# Altium PCB PCB1.PcbDoc (part 1 of 2)
Units mm, origin at the board's own origin, x right, y up, seen from the top; angles counter-clockwise.
Board outline 51.6 x 51.6 mm, 4 copper layers (Top Layer, Internal Plane 1, Signal Layer 1, Bottom Layer), stack 0.98 mm thick; 99 components, 76 nets, 363 pads, 363 vias.
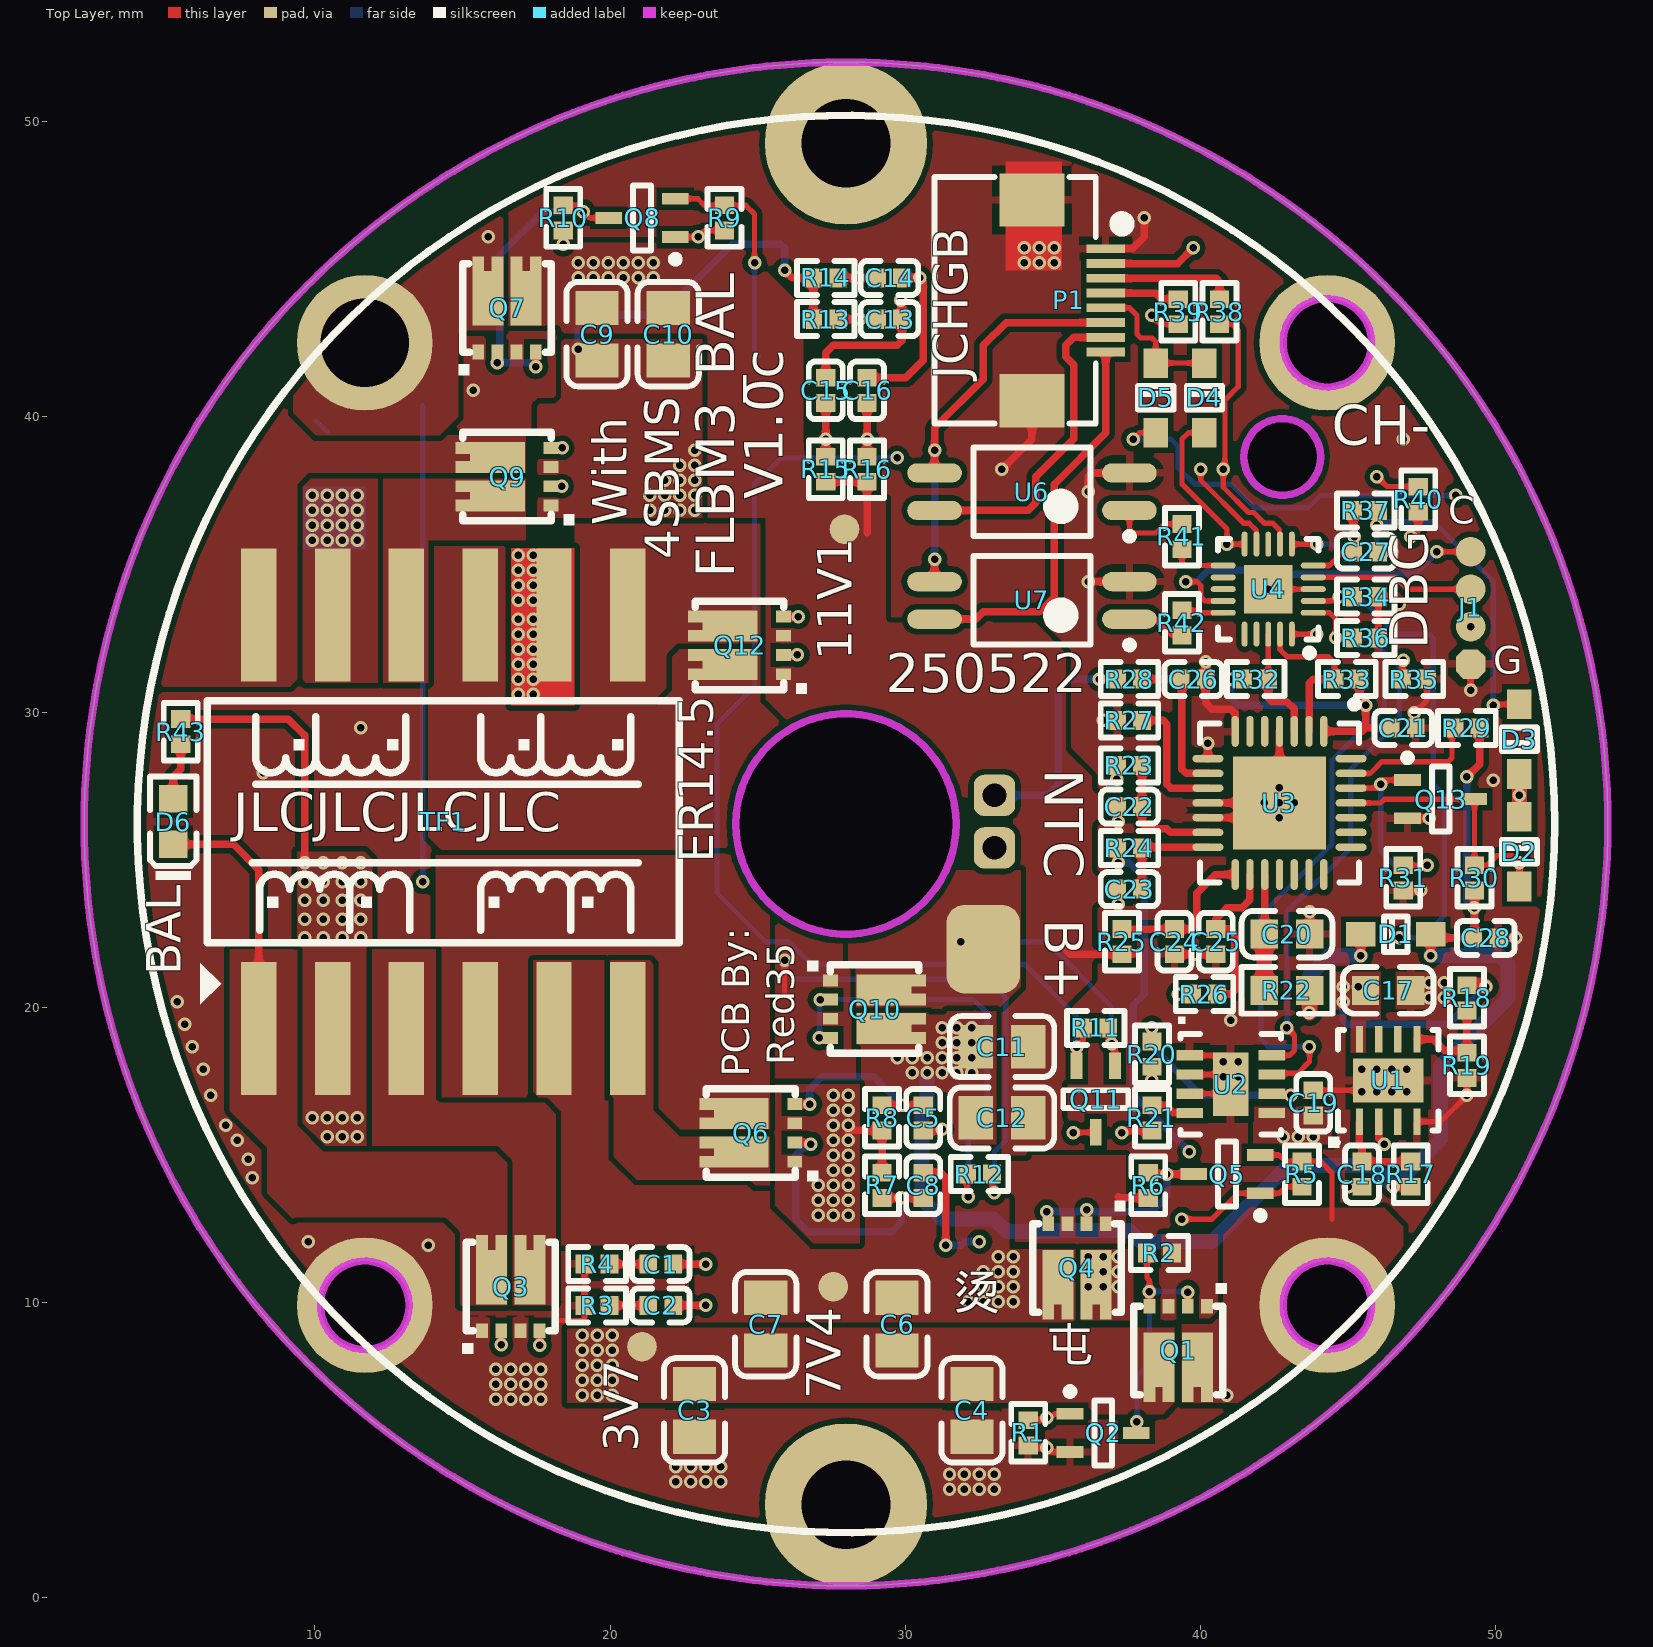
[diagram p0: Top Layer view]
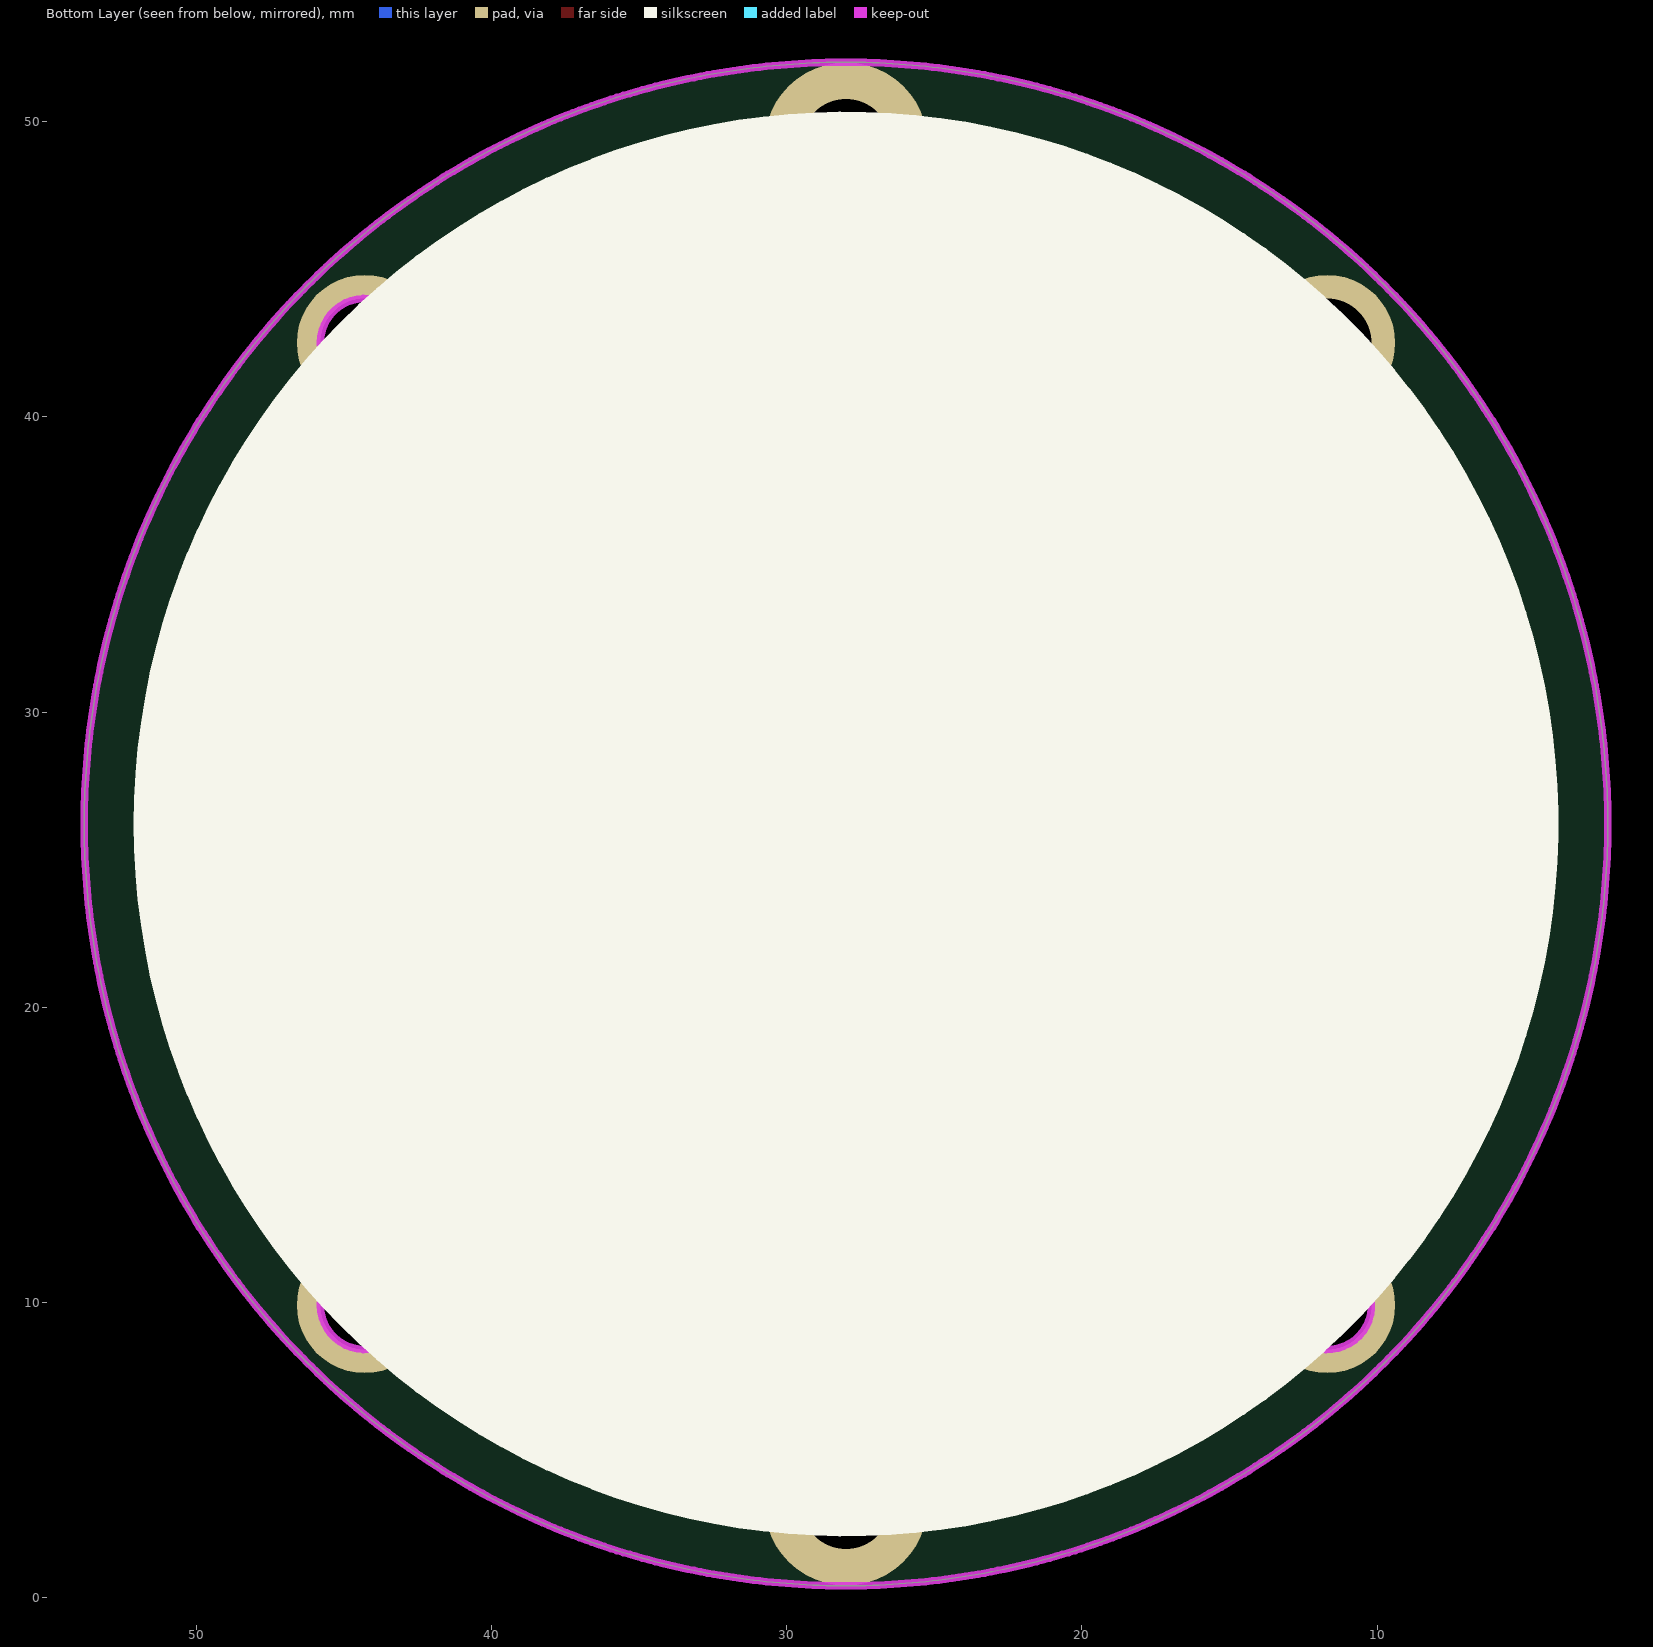
[diagram p1: Bottom Layer view, seen from below]
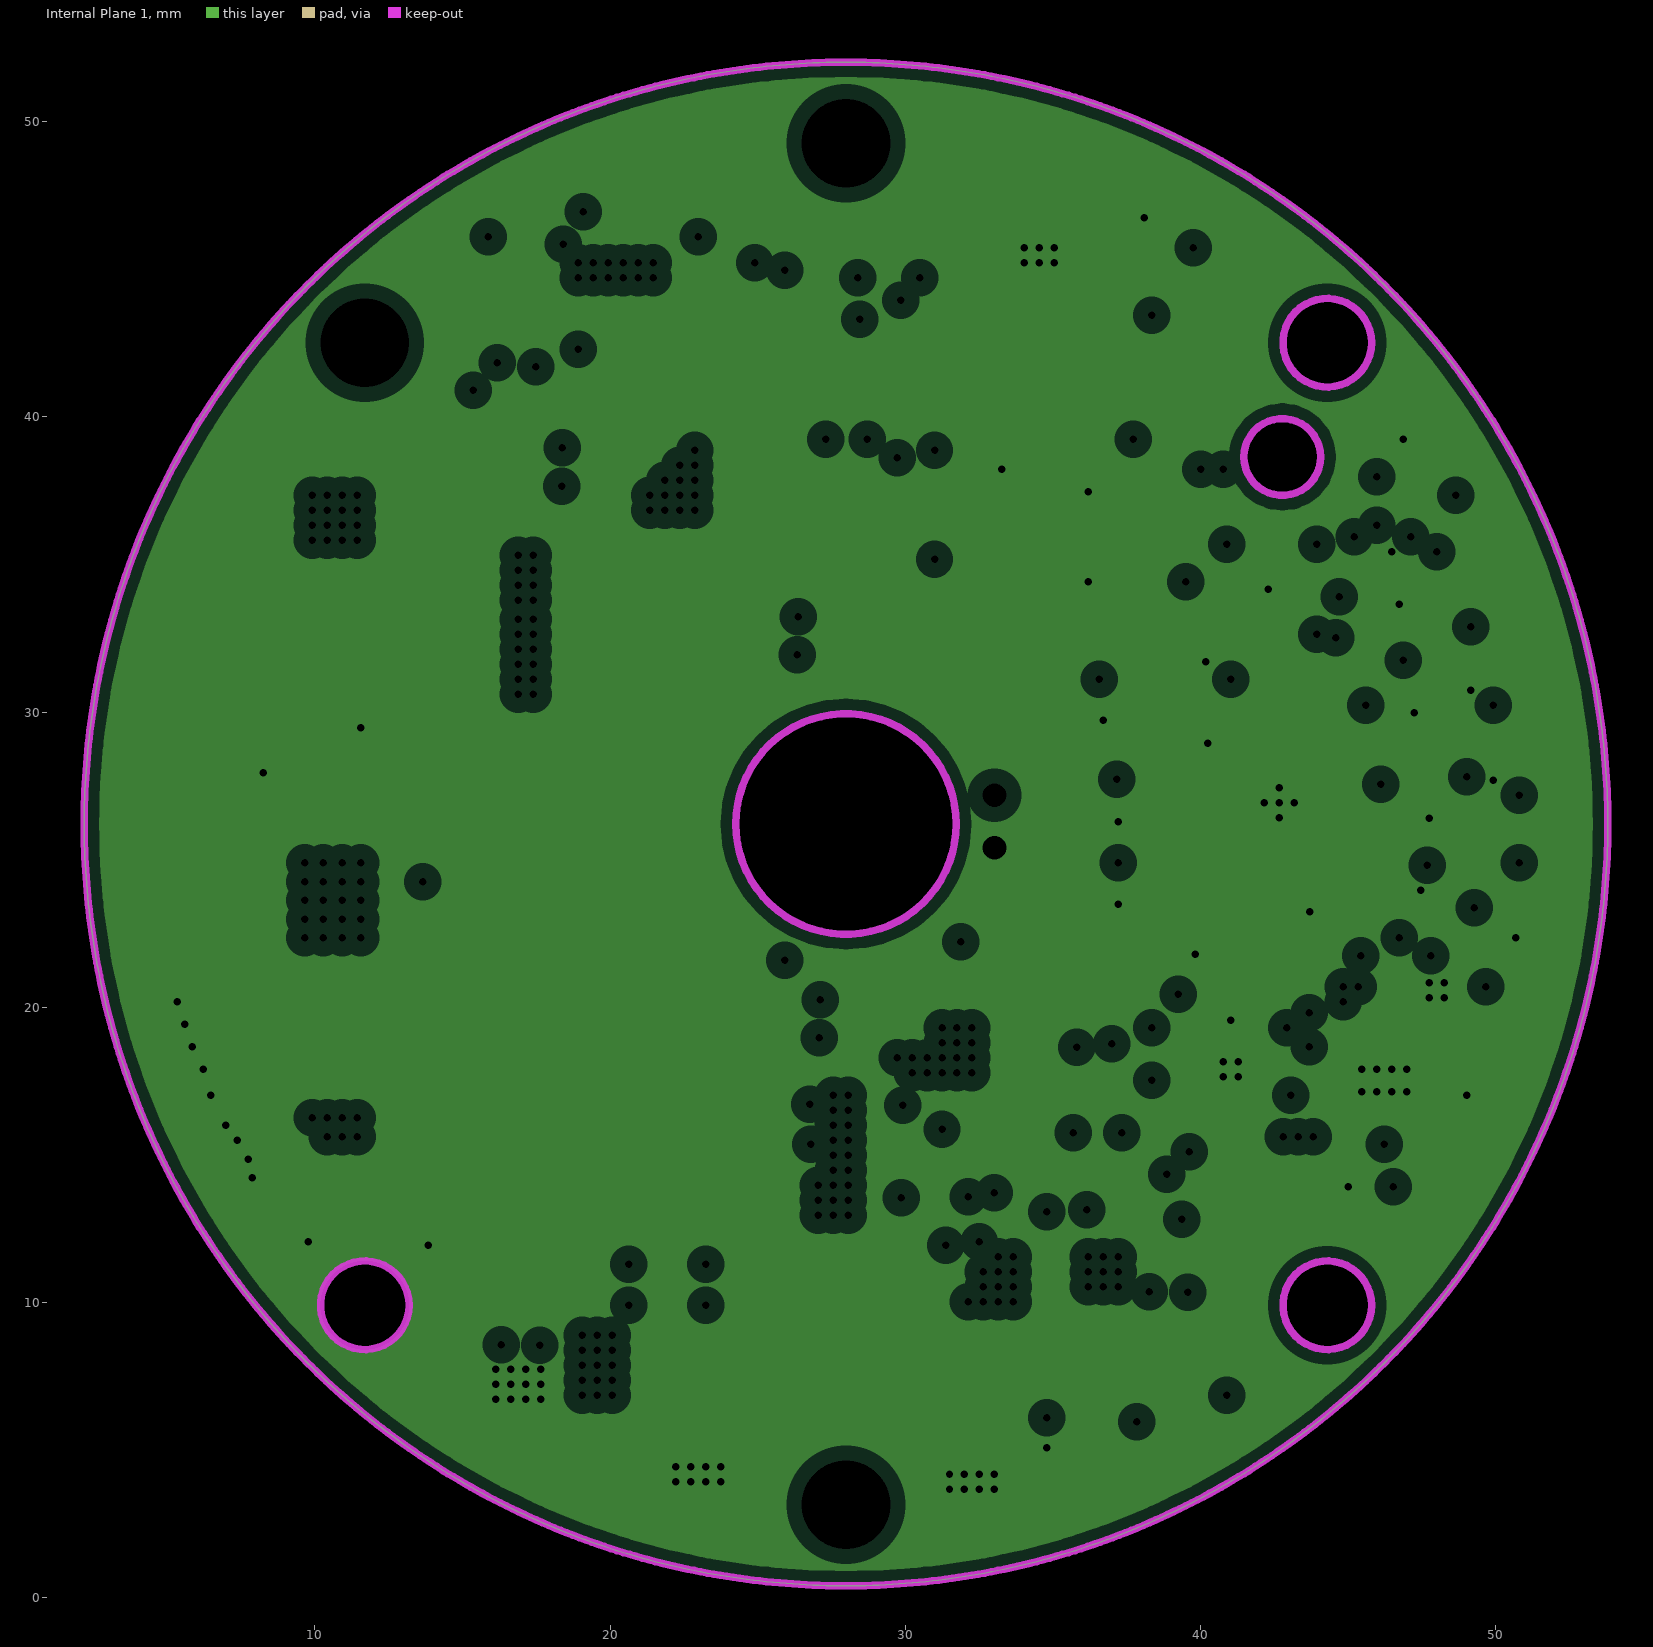
[diagram p2: Internal Plane 1, clearances drawn from the general rule]
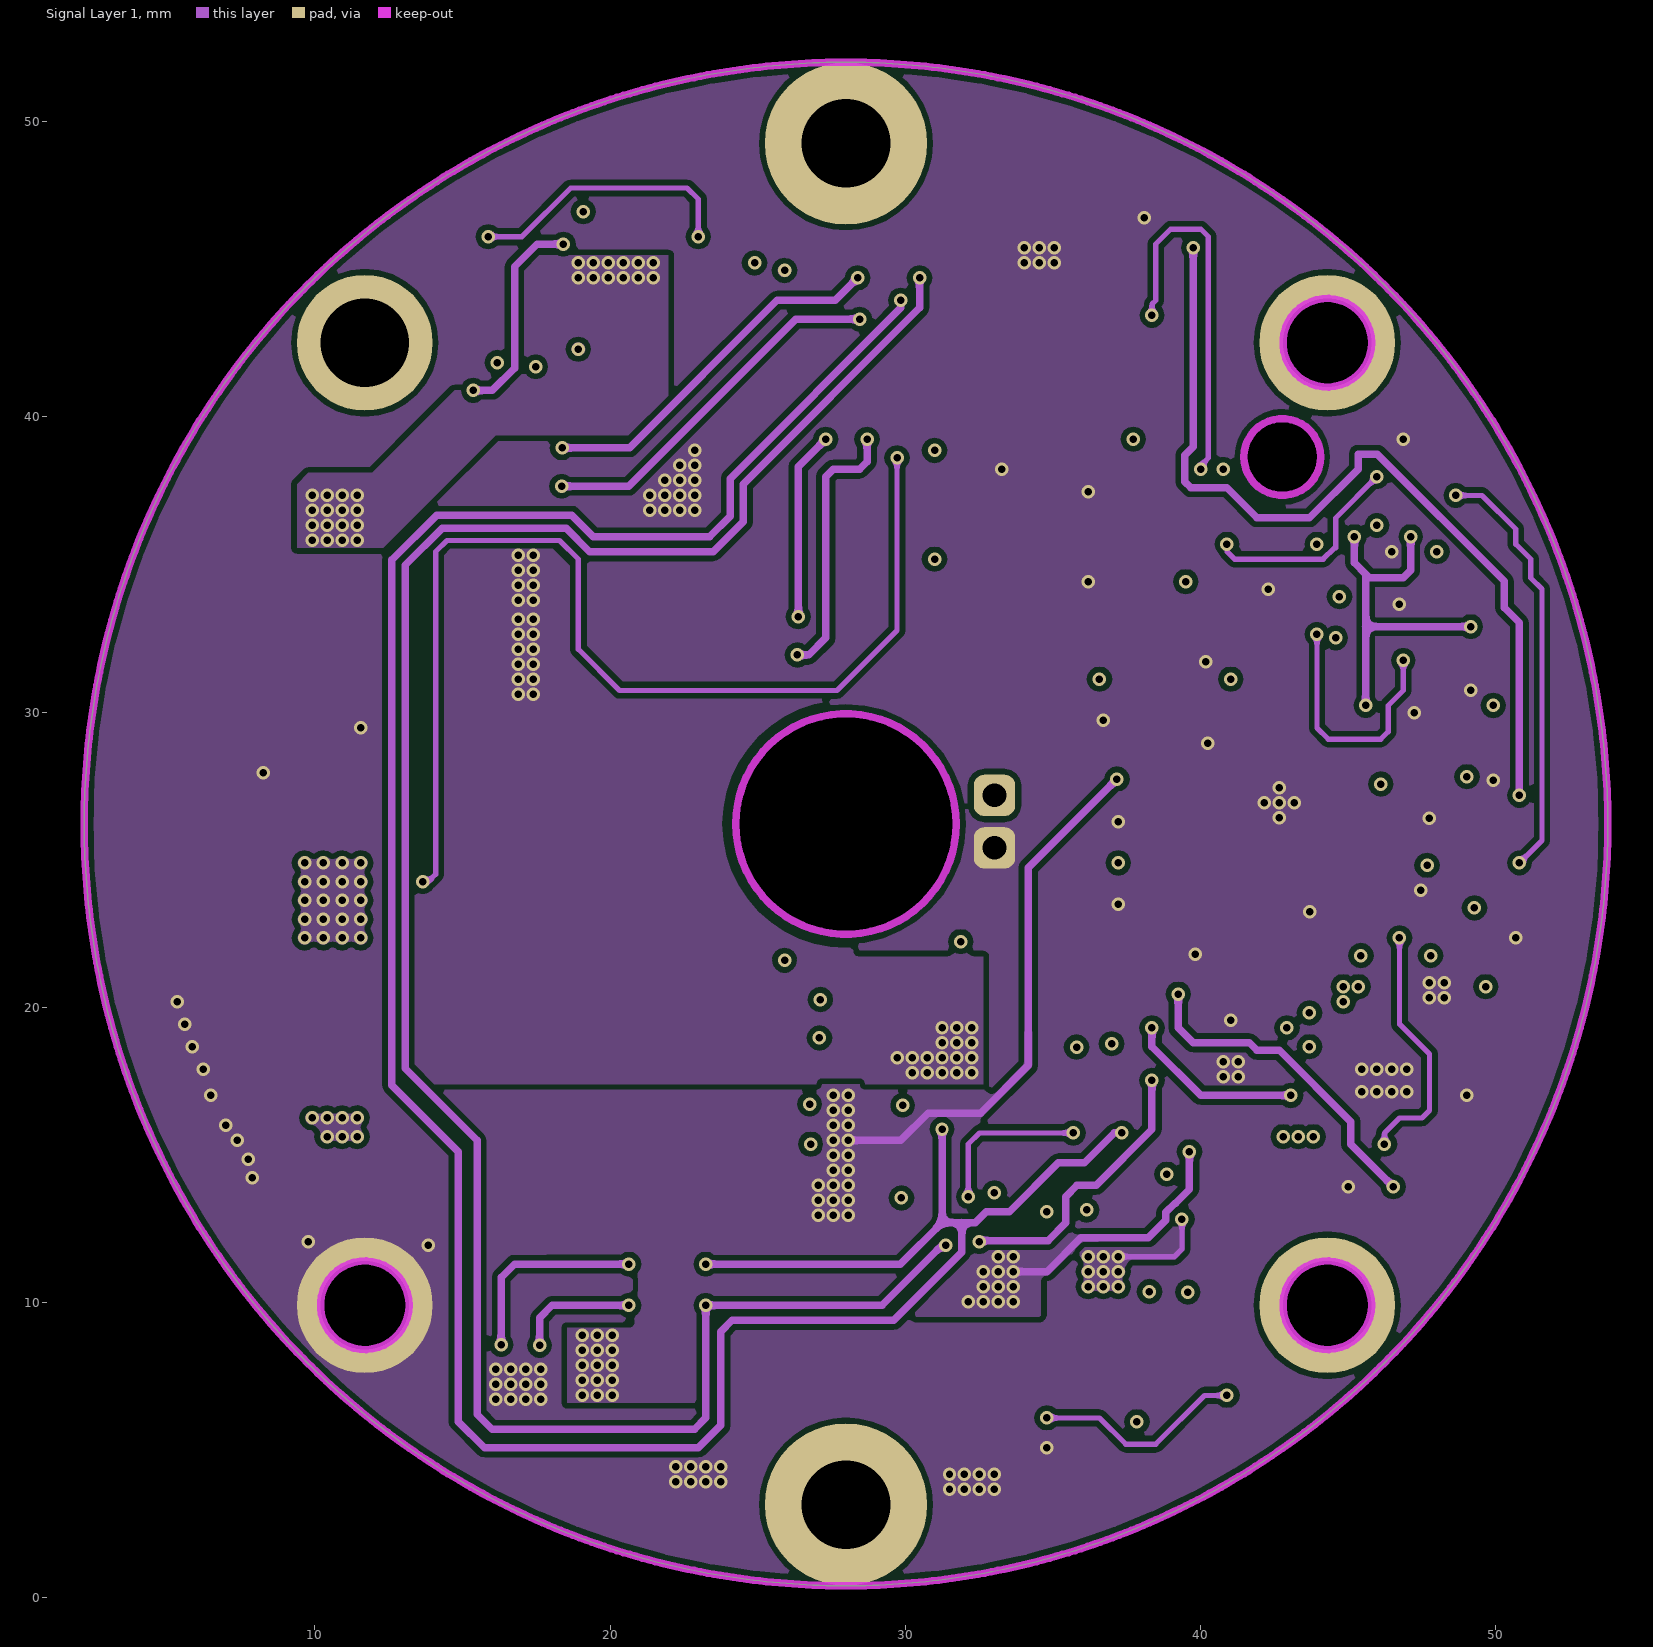
[diagram p3: Signal Layer 1]
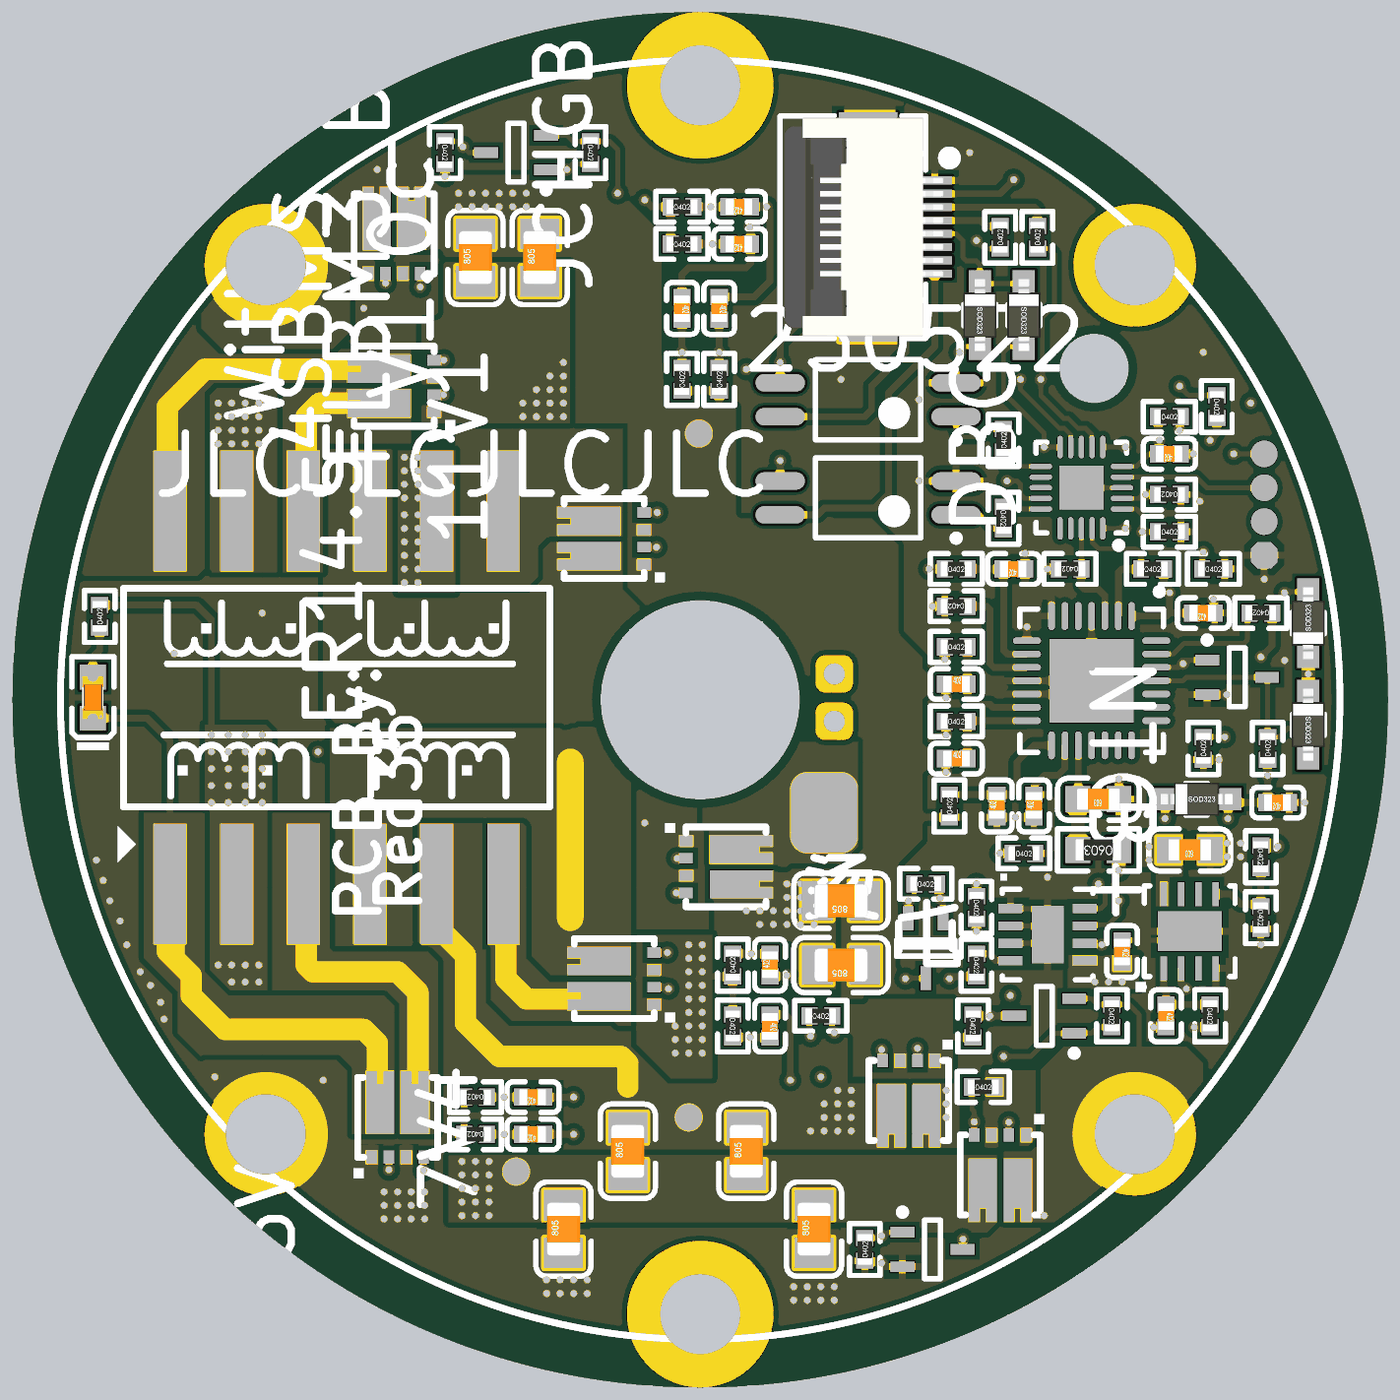
[diagram p5: 3D render of the assembled board from above, using the file's embedded part models]

## Layer stack, top to bottom
Top Solder: solder mask 0.0102, Solder Resist, Dk 3.5
Top Layer: signal copper 0.0356
Dielectric 1: core 0.3548, FR-4, Dk 4.2
Internal Plane 1: plane copper 0.036
Dielectric 3: prepreg 0.127, Dk 4.2
Signal Layer 1: signal copper 0.036
Dielectric 2: core 0.3548, Dk 4.2
Bottom Layer: signal copper 0.0356
Bottom Solder: solder mask 0.0102, Solder Resist, Dk 3.5

## Board outline
361 vertices, not listed, extent 2.191,0.409 53.791,52.009
cut-out: 41.468,38.64 ccw(c42.768,38.64) 42.768,37.34 ccw(c42.768,38.64) 44.068,38.64 ccw(c42.768,38.64) 42.768,39.94 ccw(c42.768,38.64)
cut-out: 24.257,26.209 ccw(c27.99,26.209) 27.99,22.476 ccw(c27.99,26.209) 31.723,26.209 ccw(c27.99,26.209) 27.99,29.942 ccw(c27.99,26.209)

## Design rules (kind name [scope] priority, off if disabled: settings)
Clearance [All] p1: gap=0.191
PlaneClearance [All] p1: clearance=0.508
PlaneConnect [All] p1: planeconnectstyle=Direct reliefexpansion=0.508 reliefentries=4 reliefconductorwidth=0.254 reliefairgap=0.254
PolygonConnect PolygonConnect_1 [IsVia] p1: connectstyle=Direct reliefconductorwidth=0.254 reliefentries=4 polygonreliefangle="90 Angle" airgapwidth=0.254
PolygonConnect [All] p2: connectstyle=Direct reliefconductorwidth=0.254 reliefentries=4 polygonreliefangle="90 Angle" airgapwidth=0.254
RoomDefinition main [InComponentClass('main')] p1: confinementstyle=ConfineIn formatcopy=TRUE lockcomponents=FALSE outline 113.538,-14.097 133.858,-14.097 133.858,2.413 113.538,2.413
RoutingVias [All] p1: holewidth=0.711 width=1.27 viastyle="Through Hole" minholewidth=0.711 minwidth=1.27 maxholewidth=0.711 maxwidth=1.27
SolderMaskExpansion [All] p1: expansion=0.102
Width [All] p1: maxlimit=25.4 minlimit=0.178 preferedwidth=0.254
28 further rules are at their usual default settings.

## Components (designator, comment, footprint, x,y, rotation, side; value= is the part's Value field where it differs from the comment)
C1 "100nF (104) 10% 50V" 0402_C 21.717,11.303 r180 top
C2 "100nF (104) 10% 50V" 0402_C 21.717,9.906 r180 top
C3 "GRM21BR61A476ME15L" 0805_C 22.86,6.35 r90 top
C4 "GRM21BR61A476ME15L" 0805_C 32.258,6.35 r90 top
C5 "100nF (104) 10% 50V" 0402_C 30.607,16.256 r90 top
C6 "GRM21BR61A476ME15L" 0805_C 29.718,9.271 r90 top
C7 "GRM21BR61A476ME15L" 0805_C 25.273,9.271 r90 top
C8 "100nF (104) 10% 50V" 0402_C 30.607,13.97 r270 top
C9 "GRM21BR61A476ME15L" 0805_C 19.558,42.799 r90 top
C10 "GRM21BR61A476ME15L" 0805_C 21.971,42.799 r90 top
C11 "GRM21BR61A476ME15L" 0805_C 33.274,18.669 r180 top
C12 "GRM21BR61A476ME15L" 0805_C 33.274,16.256 r180 top
C13 "100nF (104) 10% 50V" 0402_C 29.464,43.307 r180 top
C14 "100nF (104) 10% 50V" 0402_C 29.464,44.704 r180 top
C15 "100nF (104) 10% 50V" 0402_C 27.305,40.894 r270 top
C16 "100nF (104) 10% 50V" 0402_C 28.702,40.894 r270 top
C17 "GRM188R61E106KA73D" 0603_C 46.355,20.574 r180 top
C18 "1.0uF (105) 10% 25V" 0402_C 45.466,14.351 r270 top
C19 "1.0uF (105) 10% 25V" 0402_C 43.815,16.764 r270 top
C20 "GRM188R61E106KA73D" 0603_C 42.926,22.479 r180 top
C21 "10uF (106) 20% 10V" 0402_C 46.863,29.464 r180 top
C22 "100nF (104) 10% 50V" 0402_C 37.592,26.797 r0 top
C23 "100nF (104) 10% 50V" 0402_C 37.592,24.003 r0 top
C24 "100nF (104) 10% 50V" 0402_C 39.116,22.225 r90 top
C25 "100nF (104) 10% 50V" 0402_C 40.513,22.225 r90 top
C26 "10nF (103) 10% 50V" 0402_C 39.751,31.115 r180 top
C27 "100nF (104) 10% 50V" 0402_C 45.593,35.433 r180 top
C28 "100nF (104) 10% 50V" 0402_C 49.657,22.352 r180 top
D1 "B5819WS S4" SOD-323 46.609,22.479 r0 top
D2 "1N4148WS T4" SOD-323 50.8,25.273 r270 top
D3 "1N4148WS T4" SOD-323 50.8,29.083 r90 top
D4 "1N4148WS T4" SOD-323 40.132,40.64 r270 top
D5 "1N4148WS T4" SOD-323 38.481,40.64 r270 top
D6 "ZSRG-1608C-06-Z4" 0603_LED_S1 5.207,26.289 r90 top
J1 "CMS8S-JTAG-TP-1.27mm" CMS8S-JTAG-TP-1.27 49.149,35.433 r270 bottom
P1 "AFC01-S08FCA-00" "FPC0.5 2H-WS-8P" 34.29,43.942 r270 top
Q1 "XPX30K03RX" EDFN3x3 39.243,8.382 r180 top
Q2 "2N7002KW" SC70-3 36.703,5.588 r0 top
Q3 "XPX4896RX" EDFN3x3 16.637,10.541 r0 top
Q4 "XPX30K03RX" EDFN3x3 35.814,11.176 r180 top
Q5 "2N7002KW" SC70-3 40.894,14.351 r180 top
Q6 "XPX4896RX" EDFN3x3 24.765,15.748 r90 top
Q7 "XPX30K03RX" EDFN3x3 16.51,43.688 r0 top
Q8 "2N7002KW" SC70-3 21.082,46.736 r180 top
Q9 "XPX4896RX" EDFN3x3 16.51,37.973 r90 top
Q10 "XPX30K03RX" EDFN3x3 28.956,19.939 r270 top
Q11 "2N7002KW" SC70-3 36.449,16.891 r270 top locked
Q12 "XPX4896RX" EDFN3x3 24.384,32.258 r90 top
Q13 "2N7002KW" SC70-3 48.133,27.051 r0 top
R1 "510KΩ (5103) ±1%" 0402_R 34.163,5.588 r90 top
R2 "510KΩ (5103) ±1%" 0402_R 38.608,11.684 r0 top
R3 "10KΩ (1002) ±1%" 0402_R 19.558,9.906 r180 top
R4 "10KΩ (1002) ±1%" 0402_R 19.558,11.303 r180 top
R5 "510KΩ (5103) ±1%" 0402_R 43.434,14.351 r270 top
R6 "510KΩ (5103) ±1%" 0402_R 38.227,13.97 r270 top
R7 "10KΩ (1002) ±1%" 0402_R 29.21,13.97 r270 top
R8 "10KΩ (1002) ±1%" 0402_R 29.21,16.256 r90 top
R9 "510KΩ (5103) ±1%" 0402_R 23.876,46.736 r270 top
R10 "510KΩ (5103) ±1%" 0402_R 18.415,46.736 r270 top
R11 "510KΩ (5103) ±1%" 0402_R 36.449,19.304 r0 top
R12 "510KΩ (5103) ±1%" 0402_R 32.512,14.351 r0 top
R13 "10KΩ (1002) ±1%" 0402_R 27.305,43.307 r0 top
R14 "10KΩ (1002) ±1%" 0402_R 27.305,44.704 r0 top
R15 "10KΩ (1002) ±1%" 0402_R 27.305,38.227 r90 top
R16 "10KΩ (1002) ±1%" 0402_R 28.702,38.227 r90 top
R17 "10Ω (10R0) ±1%" 0402_R 47.117,14.351 r270 top
R18 "110KΩ (1103) ±1%" 0402_R 49.022,20.32 r270 top
R19 "12KΩ (1202) ±1%" 0402_R 49.022,18.034 r270 top
R20 "0Ω (0R0) ±1%" 0402_R 38.354,18.415 r270 top
R21 "0Ω (0R0) ±1%" 0402_R 38.354,16.256 r270 top
R22 "51Ω (51R0) ±1%" 0603_R 42.926,20.574 r180 top
R23 "1KΩ (1001) ±1%" 0402_R 37.592,28.194 r0 top
R24 "1KΩ (1001) ±1%" 0402_R 37.592,25.4 r0 top
R25 "1KΩ (1001) ±1%" 0402_R 37.338,22.225 r90 top
R26 "1KΩ (1001) ±1%" 0402_R 40.132,20.447 r0 top
R27 "10KΩ (1002) ±1%" 0402_R 37.592,29.718 r180 top
R28 "100Ω (1000) ±1%" 0402_R 37.592,31.115 r0 top
R29 "100KΩ (1003) ±1%" 0402_R 49.022,29.464 r180 top
R30 "100KΩ (1003) ±1%" 0402_R 49.276,24.384 r90 top
R31 "1MΩ (1004) ±1%" 0402_R 46.863,24.384 r90 top
R32 "5.1KΩ (5101) ±1%" 0402_R 41.866,31.115 r180 top
R33 "5.1KΩ (5101) ±1%" 0402_R 44.958,31.115 r0 top
R34 "10KΩ (1002) ±1%" 0402_R 45.593,33.909 r180 top
R35 "10KΩ (1002) ±1%" 0402_R 47.244,31.115 r0 top
R36 "10KΩ (1002) ±1%" 0402_R 45.593,32.512 r0 top
R37 "10KΩ (1002) ±1%" 0402_R 45.593,36.83 r0 top
R38 "2.43KΩ (2431) ±1%" 0402_R 40.64,43.561 r90 top
R39 "1KΩ (1001) ±1%" 0402_R 39.243,43.561 r90 top
R40 "10KΩ (1002) ±1%" 0402_R 47.371,37.211 r270 top
R41 "1KΩ (1001) ±1%" 0402_R 39.37,35.941 r90 top
R42 "1KΩ (1001) ±1%" 0402_R 39.37,33.02 r270 top
R43 "5.1KΩ (5101) ±1%" 0402_R 5.461,29.337 r90 top
TF1 "ER14.5" "ER14.5 SMT6+6" 14.351,26.289 r90 top locked
U1 "MPQ2013AGQ-AEC1" MPQ2013A-QFN8 46.355,17.526 r90 top
U2 "UCC27526DSDR" DSD0008D 41.021,17.399 r0 top
U3 "SH367303" QFN28-5x5 42.672,26.924 r270 top
U4 "CMS8S6990NAQN20" QFN40P300X300X800_HS-21N 42.291,34.163 r180 top locked
U6 "TLP291(GB-TP,SE" SOP127P700X210-4M 34.29,37.465 r180 top
U7 "TLP291(GB-TP,SE" SOP127P700X210-4M 34.29,33.782 r180 top

## Footprints (in the part's own frame and the unit in brackets; to place one, negate y for a bottom-side part, rotate by r counter-clockwise, add the part's x,y. Pads: shape width x height; smd on the part's side, far side on the other; paste and mask are expansions set on the pad)
0402_C [mm]
  rect 0.6x0.65 smd mask+0.051: 1(-0.425,0) 2(0.425,0)
  silkscreen extent -0.97,-0.58 0.97,0.58, body extent -0.48,-0.3 0.52,0.3, height 0.2
0402_R [mm]
  rect 0.6x0.65 smd mask+0.051: 1(-0.425,0) 2(0.425,0)
  silkscreen extent -0.97,-0.58 0.97,0.58, body extent -0.57,-0.27 0.58,0.28, height 0.41
0603_C [mm]
  rect 0.93x0.98 smd: 1(-0.77,0) 2(0.77,0)
  silkscreen extent -1.53,-0.79 1.54,0.79, body extent -0.8,-0.4 0.8,0.4, height 0.3
0603_LED_S1 [mm]
  rect 0.93x0.98 smd: A(0.77,0) K(-0.77,0)
  silkscreen extent -1.98,-0.79 1.54,0.79, body extent -0.8,-0.4 0.8,0.4, height 0.6
0603_R [mm]
  rect 0.93x0.98 smd: 1(-0.77,0) 2(0.77,0)
  silkscreen extent -1.53,-0.79 1.54,0.79, body extent -0.85,-0.4 0.85,0.4, height 0.56
0805_C [mm]
  rect 1.16x1.47 smd: 1(-0.89,0) 2(0.89,0)
  silkscreen extent -1.77,-1.04 1.77,1.04, body extent -1,-0.62 1,0.63, height 0.77
CMS8S-JTAG-TP-1.27 [mm] "CMS8S单片机使用的调试接口，采用1*4P直针排列"
  oct 1x1 smd far side mask+0.03: 1(3.81,0)
  round 1 smd far side mask+0.03: 2(2.54,0) 3(1.27,0) 4(0,0)
DSD0008D [mm] "TI WSON8, 8-Leads, Body 3.00x3.00mm, Pitch 0.65mm, Thermal Pad 2.15x1.20mm, IPC Medium Density"
  rect 0.9x0.35 smd mask+0.03: 1(-1.395,0.975) 2(-1.395,0.325) 3(-1.395,-0.325) 4(-1.395,-0.975) 5(1.395,-0.975) 6(1.395,-0.325) 7(1.395,0.325) 8(1.395,0.975)
  rect 1.2x2.15 smd mask+0.03: 9(0,0)
  silkscreen extent -2.15,-1.7 1.7,1.75, body extent -1.55,-1.55 1.55,1.55, height 0.8
EDFN3x3 [mm] "Package for EMF20B02V, Dual Drain DFN3x3"
  rect 0.4x0.5 smd mask+0.03: 1(-0.975,-1.494) 2(-0.325,-1.494) 3(0.325,-1.494) 4(0.975,-1.494) 5(0.325,1.494) 5(0.975,1.494) 6(-0.975,1.494) 6(-0.325,1.494)
  rect 1.05x1.85 smd mask+0.03: 5(0.65,0.321) 6(-0.65,0.321)
  silkscreen extent -1.65,-2.29 1.5,1.5, body extent -1.52,-1.52 1.52,1.52, height 0.9
"ER14.5 SMT6+6" [mm] "ER14.5铁氧体变压器，6+6P贴片式"
  rect 4.5x1.2 smd mask+0.03: 1(-7,6.25) 2(-7,3.75) 3(-7,1.25) 4(-7,-1.25) 5(-7,-3.75) 6(-7,-6.25) 7(7,-6.25) 8(7,-3.75) 9(7,-1.25) 10(7,1.25) 11(7,3.75) 12(7,6.25)
  silkscreen extent -6.19,-8 4.1,8.22, body extent -6.98,-8 6.98,8.13, height 7.5
"FPC0.5 2H-WS-8P" [mm] "长：8.2mm，宽：5.2mm，高：2mm"
  rect 1.8x2.2 smd: 0(-3.4,0) 0(3.4,0)
  rect 0.3x1.3 smd: 1(-1.75,2.497) 2(-1.25,2.497) 3(-0.75,2.497) 4(-0.25,2.497) 5(0.25,2.497) 6(0.75,2.497) 7(1.25,2.497) 8(1.75,2.497)
  silkscreen extent -4.17,-3.3 4.17,3.23, body extent -4.1,-3.15 4.1,2.85, height 2
MPQ2013A-QFN8 [mm] "SON, 8-Leads, Body 3.00x3.00mm, Pitch 0.65mm, Thermal Pad 2.40x1.49mm, IPC Medium Density"
  rect 0.9x0.25 smd mask+0.03: 1(-1.395,0.975) 2(-1.395,0.325) 3(-1.395,-0.325) 4(-1.395,-0.975) 5(1.395,-0.975) 6(1.395,-0.325) 7(1.395,0.325) 8(1.395,0.975)
  rect 1.49x2.4 smd mask+0.03: 9(0,0)
  silkscreen extent -2.15,-1.7 1.7,1.75, body extent -1.55,-1.55 1.55,1.55, height 1
QFN28-5x5 [mm] "QFN, 28-Leads, Body 5.00x5.00mm, Pitch 0.50mm, Thermal Pad 3.15x3.15mm, IPC Medium Density"
  oval 1.05x0.25 smd mask+0.03: 1(-2.425,1.5) 2(-2.425,1) 3(-2.425,0.5) 4(-2.425,0) 5(-2.425,-0.5) 6(-2.425,-1) 7(-2.425,-1.5) 15(2.425,-1.5) 16(2.425,-1) 17(2.425,-0.5) 18(2.425,0) 19(2.425,0.5) 20(2.425,1) 21(2.425,1.5)
  oval 0.25x1.05 smd mask+0.03: 8(-1.5,-2.425) 9(-1,-2.425) 10(-0.5,-2.425) 11(0,-2.425) 12(0.5,-2.425) 13(1,-2.425) 14(1.5,-2.425) 22(1.5,2.425) 23(1,2.425) 24(0.5,2.425) 25(0,2.425) 26(-0.5,2.425) 27(-1,2.425) 28(-1.5,2.425)
  rect 3.15x3.15 smd mask+0.03: 29(0,0)
  silkscreen extent -3.46,-2.69 2.69,2.69, body extent -2.54,-2.54 2.54,2.54, height 0.8
QFN40P300X300X800_HS-21N [mm] "QFN, 20-Leads, Body 3.00x3.00mm, Pitch 0.40mm, Thermal Pad 1.65x1.65mm, IPC Medium Density"
  oval 0.85x0.2 smd mask+0.03: 1(-1.525,0.8) 2(-1.525,0.4) 3(-1.525,0) 4(-1.525,-0.4) 5(-1.525,-0.8) 11(1.525,-0.8) 12(1.525,-0.4) 13(1.525,0) 14(1.525,0.4) 15(1.525,0.8)
  oval 0.2x0.85 smd mask+0.03: 6(-0.8,-1.525) 7(-0.4,-1.525) 8(0,-1.525) 9(0.4,-1.525) 10(0.8,-1.525) 16(0.8,1.525) 17(0.4,1.525) 18(0,1.525) 19(-0.4,1.525) 20(-0.8,1.525)
  rect 1.65x1.65 smd mask+0.03: 21(0,0)
  silkscreen extent -1.7,-1.7 1.7,2.28, body extent -1.55,-1.55 1.55,1.55, height 0.8
SC70-3 [mm] "3 Lead SC70(SOT-323) package for small Transistor"
  rect 0.9x0.4 smd mask+0.05: 1(-1.125,0.65) 2(-1.125,-0.65) 3(1.125,0)
  silkscreen extent -1.25,-1.1 0.3,1.52, body extent -0.67,-1.1 0.67,1.1, height 1.1
SOD-323 [mm]
  rect 1x0.83 smd: 1(1.18,0) 2(-1.18,0)
  silkscreen extent -0.4,-0.6 0.4,0.6, body extent -1.35,-0.62 1.35,0.63, height 1.1
SOP127P700X210-4M [mm] "SOP, 4-Leads, Body 2.70x4.40mm, Pitch 1.27mm, IPC Low Density"
  oval 1.85x0.65 smd: 1(-3.3,0.635) 2(-3.3,-0.635) 3(3.3,-0.635) 4(3.3,0.635)
  silkscreen extent -3.43,-1.5 1.97,1.63, body extent -2.2,-1.5 2.2,1.5, height 2.1

## Part data
C1 C2 C5 C8 C13 C14 C15 C16 C22 C23 C24 C25 C27 C28: library part "0402 100nF (104) 10% 16V", "贴片电容"
C3 C4 C6 C7 C9 C10 C11 C12: library part "0805 22uF (226) 20% 25V", "贴片MLCC电容，47uF (476) 20% 10V"
C17: library part "0603 10uF (106) 10% 10V", "0603贴片MLCC电容 10uF ±20% 25V X5R"
C18 C19: library part "0402 1.0uF (105) 10% 25V", "贴片电容"
C20: library part "0603 2.2uF (225) 10% 16V", "0603贴片MLCC电容 10uF ±20% 25V X5R"
C21: library part "0402 10uF (106) 20% 6.3V", "贴片电容"
C26: library part "0402 10nF (103) 10% 50V", "贴片电容"
D1 D2 D3 D4 D5: library part "SOD-323 1N4148WS T4", "二极管"
D6: library part "0603 绿灯", "发光二极管 红绿无级双色"
J1: "面向CMS8S6990NA单片机的调试贴片触点，并不是元器件实物"
P1: library part "CON 8", "翻盖式下接FPC/FFC连接器 P数:8P 间距:0.5mm"
Q1 Q4 Q7 Q10: library part XPX10H03RX, "双P沟道MOSFET, DFN3x3 -20V -30A 12mΩ"
Q2 Q5 Q8 Q11 Q13: library part "2N7002 7002", "单N沟道MOSFET(场效应管)"
Q3 Q6 Q9 Q12: library part XPX10H03RX, "双N沟道MOSFET, DFN3x3 40V 45A 7.2mΩ"
R1 R2 R5 R6 R9 R10 R11 R12: library part "0402 510KΩ (5103) 1%", "贴片电阻"
R3 R4 R7 R8 R13 R14 R15 R16 R27 R34 R35 R36 R37 R40: library part "0402 10KΩ (1002) 1%", "贴片电阻"
R17: library part "0402 10Ω (10R0) 1%", "贴片电阻"
R18 R29 R30: library part "0402 100KΩ (1003) 1%", "贴片电阻"
R19: library part "0402 12KΩ (1202) 1%", "贴片电阻"
R20 R21: library part "0402 0Ω (0R0) 1%", "贴片电阻"
R22: library part "0603 51Ω (51R0) 1%", "贴片电阻"
R23 R24 R25 R26 R39 R41 R42: library part "0402 1KΩ (1001) 1%", "贴片电阻"
R28: library part "0402 100Ω (1000) 1%", "贴片电阻"
R31: library part "0402 1MΩ (1004) 1%", "贴片电阻"
R32 R33: library part "0402 5.1KΩ (5101) 1%", "贴片电阻"
R38 R43: library part "0402 2KΩ (2001) 1%", "贴片电阻"
TF1: library part "CON 12", "ER14.5定制均衡变压器，PC40磁芯"
U1: library part MPQ2013AGQ-xx-AEC1, "MPS 40V LDO with Enable pin QFN3x3 package"
U2: "双路18V 5A峰值电流低侧栅极驱动器，WSON-8封装尺寸"
U3: "3至5串锂离子电池BMS模拟前端，具备充放电控制/电压采集和I2C接口"
U4: library part CM8S6990NA-QFN20, "增强型闪存1T 8051单片机，16KB Flash 256+1K XRAM"
U6 U7: library part Optoisolator1, "DC输入光电耦合隔离器，线性输入输出，隔离电压(rms):3750V SOP-4小型封装"

## Free pads (board coordinates)
  round 4.6 hole 3 mask+0.03: 2(11.692,9.91) 2(11.692,42.508) 2(44.289,9.91) 2(44.289,42.508)
  round 5.5 hole 3 mask+0.03: 2(27.99,3.159) 2(27.99,49.259)
  rrect50% 1.4x1.4 hole 0.8 mask+0.03: 13(33.02,27.178) 14(33.02,25.4)
  rrect50% 2.5x3 smd mask+0.03: 15(32.639,21.971)
  round 1 smd mask+0.03: 16(27.559,10.541) 17(21.082,8.509) 18(27.94,36.195)

## Via types
v1: diameter 0.457, hole 0.254, Top Layer to Bottom Layer, tented both sides, 363 vias

## Nets (pads, with @x,y where several pads share a name; then routed paths per layer and width w, separated by ;. In a path a pad name is that pad's centre, name@x,y a point inside that pad or via, vN(x,y) a via of type N, cw(c..) or ccw(c..) an arc to the next point about the centre after c; other vN are vias at no path point)
3V3: C21.2 C27.2 J1.2 R32.2 R33.2 R37.1 R40.2 U3.1 U4.5 | length 25.5
  Top Layer w0.178: U4.5@43.816,34.963 44.361,34.963 44.831,35.433 C27.2@45.168,35.433 45.168,35.897 v1(45.212,35.941)
  Top Layer w0.254: U3.1@44.172,29.349 45.478,29.349 45.593,29.464 ; R37.1@45.168,36.83 45.168,35.985 v1(45.212,35.941) ; R33.2@45.383,31.115 45.383,30.436 v1(45.593,30.226) 45.593,29.464 ; C21.2@46.438,29.464 45.593,29.464 ; v1(47.117,35.941) 47.371,36.195 R40.2@47.371,36.786
  Signal Layer 1 w0.254: v1(45.212,35.941) 45.212,35.052 45.593,34.671 ; v1(45.593,30.226) 45.593,32.893 ; v1(47.117,35.941) 47.117,34.798 46.863,34.544 45.72,34.544 45.593,34.671 ; v1(49.149,32.893) 45.593,32.893 ; 45.593,32.893 45.593,34.671
  Bottom Layer w0.254: v1(41.021,31.115) 41.021,30.48 41.275,30.226 v1(45.593,30.226)
3V7: C3.2 C4.2 C6.1 C7.1 pad.17 Q1.5 Q6.1 Q6.3 R7.1 R8.1 R23.1 R43.2 TF1.2 | length 30
  Top Layer w0.254: R43.2@5.461,29.762 9.1,29.762 9.652,29.21 v1(9.652,24.892) ; 28.067,15.748 28.15,15.831 R8.1@29.21,15.831 R7.1@29.21,14.351 ; R23.1@37.167,28.194 v1(37.167,27.73) v1@37.211,27.686
  Signal Layer 1 w0.254: v1(28.067,15.494) 29.845,15.494 30.772,16.421 32.55,16.421 34.163,18.034 34.163,24.726 v1(37.167,27.73)
  other v1: 19.05,6.858 19.558,6.858 20.066,6.858 19.05,7.366 19.558,7.366 20.066,7.366 19.05,7.874 19.558,7.874 20.066,7.874 19.05,8.382 19.558,8.382 20.066,8.382 19.05,8.89 19.558,8.89 20.066,8.89 27.051,12.954 27.559,12.954 28.067,12.954 27.051,13.462 27.559,13.462 28.067,13.462 27.051,13.97 27.559,13.97 28.067,13.97 27.559,14.478 28.067,14.478 27.559,14.986 28.067,14.986 27.559,15.494 10.414,15.621 10.922,15.621 11.43,15.621 27.559,16.002 28.067,16.002 9.906,16.256 10.414,16.256 10.922,16.256 11.43,16.256 27.559,16.51 28.067,16.51 27.559,17.018 28.067,17.018 9.652,22.352 10.287,22.352 10.922,22.352 11.557,22.352 9.652,22.987 10.287,22.987 10.922,22.987 11.557,22.987 9.652,23.622 10.287,23.622 10.922,23.622 11.557,23.622 9.652,24.257 10.287,24.257 10.922,24.257 11.557,24.257 10.287,24.892 10.922,24.892 11.557,24.892
7V4: C6.2 C7.2 C9.1 C10.1 pad.16 Q4.5 Q9.1 Q9.3 R13.1 R14.1 R24.1 TF1.5 | length 32.5
  Top Layer w0.254: v1(25.908,44.958) 26.162,44.704 R14.1@26.88,44.704 R13.1@26.88,43.307 ; R24.1@37.167,25.4 37.167,24.936 v1(37.211,24.892)
  Signal Layer 1 w0.254: v1(33.655,11.049) 34.798,11.049 35.941,12.192 38.227,12.192 38.824,12.789 38.824,13.053 39.144,13.373 39.154,13.373 39.624,13.843 v1(39.624,15.113)
  Bottom Layer w0.254: v1(18.923,42.291) 18.923,42.926 19.431,43.434 21.717,43.434 24.13,45.847 25.781,45.847 25.908,45.72 v1(25.908,44.958) ; v1(37.211,24.892) 37.592,24.892 38.1,24.384 38.1,20.447 37.719,20.066 37.719,17.018 v1(39.624,15.113)
  other v1: 32.131,10.033 32.639,10.033 33.147,10.033 33.655,10.033 32.639,10.541 33.147,10.541 33.655,10.541 32.639,11.049 33.147,11.049 33.147,11.557 33.655,11.557 21.336,36.83 21.844,36.83 22.352,36.83 22.86,36.83 21.336,37.338 21.844,37.338 22.352,37.338 22.86,37.338 21.844,37.846 22.352,37.846 22.86,37.846 22.352,38.354 22.86,38.354 22.86,38.862
12V6: C9.2 C10.2 C11.1 C12.1 pad.18 Q7.5 Q12.1 Q12.3 R15.1 R16.1 R25.1 TF1.11 | length 5.5
  Top Layer w0.254: R15.1@27.305,37.802 R16.1@28.702,37.802 28.702,36.068 ; 35.433,21.95 35.583,21.8 37.719,21.8
  other v1: 9.906,35.814 10.414,35.814 10.922,35.814 11.43,35.814 9.906,36.322 10.414,36.322 10.922,36.322 11.43,36.322 9.906,36.83 10.414,36.83 10.922,36.83 11.43,36.83 9.906,37.338 10.414,37.338 10.922,37.338 11.43,37.338 18.923,44.704 19.431,44.704 19.939,44.704 20.447,44.704 20.955,44.704 21.463,44.704 18.923,45.212 19.431,45.212 19.939,45.212 20.447,45.212 20.955,45.212 21.463,45.212
16V8: C11.2 C12.2 C28.2 D1.1 Q10.5 R17.2 R26.1 R29.1 R30.1 TF1.8 | length 56.7
  Top Layer w0.254: v1(39.243,20.447) R26.1@39.707,20.447 ; v1@46.482,13.97 v1(46.526,13.926) R17.2@47.117,13.926 ; v1@47.752,21.717 v1(47.789,21.754) D1.1@47.789,22.479 47.916,22.352 C28.2@49.232,22.352 49.276,22.396 v1(49.276,23.368) R30.1@49.276,23.959 ; v1(49.022,27.813) 49.447,28.238 R29.1@49.447,29.464
  Signal Layer 1 w0.254: v1(39.243,20.447) 39.243,19.304 39.751,18.796 41.656,18.796 41.91,18.542 42.672,18.542 45.085,16.129 45.085,15.367 v1(46.526,13.926) ; v1(47.789,21.754) v1@47.826,21.717
  Bottom Layer w0.254: v1(49.022,27.813) 49.022,23.622 v1(49.276,23.368)
  Bottom Layer w0.508: v1(30.734,17.78) 30.734,16.555 30.569,16.389 30.569,13.5 31.242,12.827 33.02,12.827 33.439,12.408 35.077,12.408 35.115,12.446 37.592,12.446 37.973,12.065 40.386,12.065 42.972,14.651 45.801,14.651 v1(46.526,13.926) 48.133,15.533 48.133,18.034 50.419,20.32 50.419,21.463 50.128,21.754 v1(47.789,21.754)
  other v1: 30.226,17.78 31.242,17.78 31.75,17.78 32.258,17.78 29.718,18.288 30.226,18.288 30.734,18.288 31.242,18.288 31.75,18.288 32.258,18.288 31.242,18.796 31.75,18.796 32.258,18.796 31.242,19.304 31.75,19.304 32.258,19.304 16.891,30.607 17.399,30.607 16.891,31.115 17.399,31.115 16.891,31.623 17.399,31.623 16.891,32.131 17.399,32.131 16.891,32.639 17.399,32.639 16.891,33.147 17.399,33.147 16.891,33.782 17.399,33.782 16.891,34.29 17.399,34.29 16.891,34.798 17.399,34.798 16.891,35.306 17.399,35.306
ACTCMD: R42.1 U4.15 | length 1.4
  Top Layer w0.178: R42.1@39.37,33.445 39.834,33.445 39.916,33.363 U4.15@40.766,33.363
ACTN: P1.8 U7.4 | length 13.4
  Top Layer w0.254: U7.4@30.99,33.147 32.385,33.147 32.639,33.401 34.544,33.401 35.052,33.909 35.052,37.719 36.787,39.454 P1.8@36.787,42.192
BNTC: pad.13 R28.1 | length 7.6
  Top Layer w0.254: v1(36.576,31.115) R28.1@37.167,31.115
  Bottom Layer w0.254: pad.13@33.02,27.178 34.798,27.178 35.179,27.559 35.179,30.734 35.56,31.115 v1(36.576,31.115)
CDCT: D2.1 D5.1 Q13.3 R30.2 U3.25 | length 36.9
  Top Layer w0.178: v1(37.719,39.243) 37.936,39.46 D5.1@38.481,39.46 ; U3.25@45.097,26.924 46.101,26.924 46.228,27.051 Q13.3@49.258,27.051 49.276,27.033 R30.2@49.276,24.809 49.701,24.809 50.038,25.146 50.546,25.146 v1(50.8,24.892) D2.1@50.8,24.093
  Signal Layer 1 w0.178: v1(48.641,37.338) 49.53,37.338 50.673,36.195 50.673,35.687 51.181,35.179 51.181,34.544 51.562,34.163 51.562,25.654 v1(50.8,24.892)
  Bottom Layer w0.178: v1(37.719,39.243) 38.989,39.243 39.243,38.989 39.243,38.271 39.795,37.719 41.021,37.719 41.821,36.919 43.65,36.919 44.069,37.338 v1(48.641,37.338)
CELL1: pad.2@44.289,9.91 Q1.6 Q2.1 Q5.2 R1.2 R5.1 | length 12.9
  Top Layer w0.178: R1.2@34.163,6.013 34.842,6.013 35.067,6.238 Q2.1@35.578,6.238 ; Q5.2@42.019,15.001 42.657,15.001 42.882,14.776 R5.1@43.434,14.776 44.069,14.776 44.45,14.395 44.45,12.827
  Signal Layer 1 w0.178: v1(34.798,6.096) 36.576,6.096 37.465,5.207 38.481,5.207 40.132,6.858 v1(40.894,6.858)
CELL1H: D6.K Q3.6 TF1.1 | length 8.6
  Top Layer w0.254: D6.K@5.207,25.519 7.247,25.519 8.101,24.665 TF1.1@8.101,19.289
CELL1L: Q3.5 TF1.3
CELL2: pad.2@44.289,42.508 Q4.6 Q5.1 Q8.2 R5.2 R9.1 | length 15.6
  Top Layer w0.178: Q8.2@22.207,47.386 22.972,47.386 23.197,47.161 R9.1@23.876,47.161 24.594,47.161 24.892,46.863 v1(24.892,45.212) ; v1(39.37,12.827) 40.386,12.827 41.26,13.701 Q5.1@42.019,13.701 42.657,13.701 42.882,13.926 R5.2@43.434,13.926
  Signal Layer 1 w0.178: v1(37.211,11.557) 39.116,11.557 39.37,11.811 v1(39.37,12.827)
  Bottom Layer w0.178: v1(24.892,45.212) 24.892,42.164 25.019,42.037
  other v1: 36.195,10.541 36.703,10.541 37.211,10.541 36.195,11.049 36.703,11.049 37.211,11.049 36.195,11.557 36.703,11.557
CELL2H: Q6.5 TF1.4
CELL2L: Q6.6 TF1.6
CELL3: pad.2@11.692,42.508 Q7.6 Q8.1 Q11.2 R9.2 R11.1 | length 101.4
  Top Layer w0.178: Q8.1@22.207,46.086 22.972,46.086 v1(22.987,46.101) 23.197,46.311 R9.2@23.876,46.311 ; Q11.2@35.799,18.016 v1(35.799,18.654) 36.024,18.879 R11.1@36.024,19.304
  Signal Layer 1 w0.178: v1(13.652,24.257) 13.843,24.257 14.097,24.511 14.097,35.433 14.478,35.814 18.288,35.814 18.923,35.179 18.923,32.131 20.32,30.734 27.686,30.734 29.718,32.766 v1(29.718,38.608) ; v1(15.875,46.101) 17.018,46.101 18.669,47.752 22.606,47.752 22.987,47.371 v1(22.987,46.101)
  Bottom Layer w0.178: 10.033,39.878 10.414,39.497 ; v1(13.652,24.257) 13.652,40.386 ; v1(29.718,38.608) 25.781,38.608 24.892,37.719 24.892,30.861 23.622,29.591 23.622,23.876 25.273,22.225 26.035,22.225 26.797,21.463 34.036,21.463 35.799,19.7 v1(35.799,18.654)
CELL3H: Q9.6 TF1.10
CELL3L: Q9.5 TF1.12
CELL4: pad.15 Q10.6 Q11.1 R11.2 | length 8.7
  Top Layer w0.178: R11.2@36.874,19.304 36.874,18.879 v1(36.987,18.766) 37.099,18.654 Q11.1@37.099,18.016
  Bottom Layer w0.178: v1(31.877,22.225) 34.798,22.225 36.987,20.036 v1(36.987,18.766)
CELL4H: Q12.5 TF1.7
CELL4L: Q12.6 TF1.9
CG1: Q1.2 Q1.4 Q2.3 R2.1 | length 8.6
  Top Layer w0.178: Q2.3@37.828,5.588 37.846,5.606 v1(37.846,5.969) ; R2.1@38.183,11.684 38.183,10.839 38.268,10.754 v1(38.268,10.373) Q1.4@38.268,9.876 ; Q1.2@39.568,9.876 v1(39.568,10.358)
  Bottom Layer w0.178: v1(37.846,5.969) 37.846,7.493 38.268,7.915 v1(38.268,10.373) 39.553,10.373 v1(39.568,10.358)
CG2: Q4.2 Q4.4 Q5.3 R6.1 | length 7.6
  Top Layer w0.254: v1(34.798,13.081) 34.839,13.04 Q4.4@34.839,12.67 ; v1@36.068,13.208 v1(36.139,13.137) Q4.2@36.139,12.67 ; R6.1@38.227,14.395 38.271,14.351 v1(38.862,14.351) Q5.3@39.769,14.351
  Bottom Layer w0.254: v1(34.798,13.081) 38.354,13.081 38.862,13.589 v1(38.862,14.351)
CG3: Q7.2 Q7.4 Q8.3 R10.1 | length 10.7
  Top Layer w0.178: Q7.4@17.485,42.194 v1(17.485,41.697) v1@17.526,41.656 ; R10.1@18.415,47.161 18.879,47.161 v1(19.092,46.948) 19.304,46.736 Q8.3@19.957,46.736
  Bottom Layer w0.254: v1(17.485,41.697) 17.343,41.839 v1(16.185,41.839) 16.256,41.91 16.256,45.466 17.738,46.948 v1(19.092,46.948)
CG4: Q10.2 Q10.4 Q11.3 R12.1 | length 21.3
  Top Layer w0.178: v1@27.051,18.923 v1(27.092,18.964) Q10.4@27.462,18.964 ; v1@27.051,20.193 v1(27.122,20.264) Q10.2@27.462,20.264 ; R12.1@32.087,14.351 32.087,13.633 v1(32.131,13.589) ; v1(35.687,15.748) 35.705,15.766 Q11.3@36.449,15.766
  Signal Layer 1 w0.178: v1(32.131,13.589) 32.131,15.367 32.512,15.748 v1(35.687,15.748)
  Bottom Layer w0.178: v1(27.092,18.964) 27.092,20.234 v1(27.122,20.264) 32.314,20.264 32.766,19.812 32.766,16.256 32.131,15.621 32.131,13.843
CGND: P1.6 U6.3 U7.3 | length 13.9
  Top Layer w0.254: v1(30.988,35.179) 30.99,35.177 U7.3@30.99,34.417 ; U6.3@30.99,38.1 30.99,38.86 v1(30.988,38.862) 30.988,39.624 32.639,41.275 32.639,42.418 33.413,43.192 P1.6@36.787,43.192
  Bottom Layer w0.254: v1(30.988,35.179) v1(30.988,38.862)
CHGDISN: P1.7 U6.4 | length 11
  Top Layer w0.254: U6.4@30.99,36.83 34.163,36.83 34.417,37.084 34.417,37.973 34.671,38.227 35.708,39.264 35.708,41.762 35.433,42.037 35.433,42.418 35.707,42.692 P1.7@36.787,42.692
CHGO: Q13.1 R31.2 U3.26 | length 6.9
  Top Layer w0.178: U3.26@45.097,27.424 45.966,27.424 v1(46.105,27.563) 46.243,27.701 Q13.1@47.008,27.701 ; R31.2@46.863,24.809 v1(47.669,24.809)
  Bottom Layer w0.178: v1(46.105,27.563) 46.101,27.559 46.101,25.273 46.565,24.809 v1(47.669,24.809)
CHGOFF: R41.1 U4.11 | length 1.9
  Top Layer w0.178: R41.1@39.37,35.516 39.37,35.052 39.459,34.963 U4.11@40.766,34.963
DISDCT: R29.2 U3.27 | length 4.7
  Top Layer w0.178: U3.27@45.097,27.924 45.748,27.924 46.145,28.321 48.387,28.321 48.514,28.448 48.514,29.381 R29.2@48.597,29.464
DRVCC: C17.2 C19.2 R18.1 U1.8 U2.5 | length 6.7
  Top Layer w0.508: R18.1@49.022,20.745 49.613,20.745 v1(49.657,20.701)
  Bottom Layer w0.254: v1(44.831,20.193) 44.831,19.558 44.958,19.431 48.387,19.431 v1(49.657,20.701)
  other v1: 42.799,15.621 43.307,15.621 43.815,15.621 44.831,20.701 45.339,20.701
DRVE: R34.2 U1.2 U4.2 | length 25.9
  Top Layer w0.178: U4.2@43.816,33.763 44.558,33.763 v1(44.704,33.909) R34.2@45.168,33.909
  Top Layer w0.254: U1.2@46.03,16.131 46.03,15.565 v1(46.228,15.367)
  Signal Layer 1 w0.178: v1(46.228,15.367) 46.228,15.748 46.736,16.256 47.498,16.256 47.752,16.51 47.752,18.415 46.736,19.431 v1(46.736,22.352)
  Bottom Layer w0.178: v1(44.704,33.909) 45.339,33.909 46.609,32.639 47.752,32.639 47.879,32.512 47.879,27.559 48.26,27.178 48.26,23.114 47.498,22.352 v1(46.736,22.352)
DRVFB: R18.2 R19.1 U1.5 | length 3.3
  Top Layer w0.254: U1.5@47.33,18.921 47.881,18.921 48.26,18.542 48.939,18.542 R19.1@49.022,18.459 R18.2@49.022,19.895
DRVH: C1.1 C5.1 C13.1 C15.1 R21.2 | length 102.4
  Top Layer w0.254: C1.1@22.142,11.303 v1(23.241,11.303) ; C15.1@27.305,41.319 27.305,42.164 27.559,42.418 29.718,42.418 29.889,42.589 C13.1@29.889,43.307 29.889,43.898 v1(29.845,43.942) ; C5.1@30.607,15.831 31.198,15.831 v1(31.242,15.875) ; v1(37.338,15.748) 37.421,15.831 R21.2@38.354,15.831
  Signal Layer 1 w0.254: v1(23.241,11.303) 29.835,11.303 31.242,12.71 ; v1(29.845,43.942) 29.845,43.688 24.066,37.91 24.066,36.639 23.368,35.941 19.431,35.941 18.707,36.665 14.126,36.665 12.611,35.15 12.611,17.361 14.859,15.113 14.859,5.969 15.748,5.08 22.987,5.08 23.749,5.842 23.749,9.017 24.13,9.398 29.601,9.398 31.915,11.712 31.915,12.71 ; v1(31.242,15.875) 31.242,12.71 ; v1(37.338,15.748) 37.084,15.748 36.068,14.732 35.179,14.732 33.528,13.081 32.745,13.081 32.375,12.71 31.242,12.71
DRVL: C2.1 C8.1 C14.1 C16.1 R20.2 | length 95.2
  Top Layer w0.254: C2.1@22.142,9.906 v1(23.241,9.906) ; C16.1@28.702,41.319 30.016,41.319 30.607,41.91 30.607,44.577 v1(30.48,44.704) C14.1@29.889,44.704 ; C8.1@30.607,14.395 31.198,14.395 31.369,14.224 v1(31.369,11.938) ; v1(38.354,17.526) R20.2@38.354,17.99
  Signal Layer 1 w0.254: v1(30.48,44.704) 30.48,43.688 24.511,37.719 24.511,36.449 23.495,35.433 19.304,35.433 18.517,36.22 14.31,36.22 13.056,34.966 13.056,17.932 15.494,15.494 15.494,6.223 16.002,5.715 22.86,5.715 23.241,6.096 v1(23.241,9.906) 29.21,9.906 31.242,11.938 v1(31.369,11.938) ; v1(32.512,12.065) 32.55,12.103 34.836,12.103 35.433,12.7 35.433,13.589 35.814,13.97 36.459,13.97 38.354,15.865 v1(38.354,17.526)
  Bottom Layer w0.254: v1(31.369,11.938) 31.877,11.938 32.004,12.065 v1(32.512,12.065)
DSCK: J1.4 U4.14 | length 11.7
  Top Layer w0.178: v1(39.497,34.417) 39.878,34.417 40.005,34.29 40.005,33.909 40.151,33.763 U4.14@40.766,33.763 ; v1(48.006,35.433) J1.4@49.149,35.433
  Bottom Layer w0.254: v1(39.497,34.417) 39.878,34.417 40.259,34.798 42.672,34.798 42.799,34.671 47.244,34.671 47.816,35.242
DSDA: J1.3 U4.4 | length 5.5
  Top Layer w0.178: U4.4@43.816,34.563 46.591,34.563 46.991,34.163 J1.3@49.149,34.163
GH1: C1.2 Q3.2 R4.1 | length 8.7
  Top Layer w0.178: Q3.2@16.312,9.047 v1(16.312,8.58) v1@16.383,8.509
  Top Layer w0.254: R4.1@19.983,11.303 v1(20.637,11.303) C1.2@21.292,11.303
  Signal Layer 1 w0.254: v1(16.312,8.58) 16.312,10.851 16.764,11.303 17.843,11.303 v1(20.637,11.303)
GH2: C5.2 Q6.4 R8.2 | length 6.2
  Top Layer w0.254: Q6.4@26.259,16.723 v1(26.756,16.723) v1@26.797,16.764 ; R8.2@29.21,16.681 v1(29.908,16.681) C5.2@30.607,16.681
  Bottom Layer w0.254: v1(26.756,16.723) 26.756,17.231 27.178,17.653 28.937,17.653 v1(29.908,16.681)
GH3: C13.2 Q9.2 R13.2 | length 14.1
  Top Layer w0.178: Q9.2@18.004,37.648 v1(18.359,37.648)
  Top Layer w0.254: R13.2@27.73,43.307 C13.2@29.039,43.307
  Signal Layer 1 w0.254: v1(18.359,37.648) 20.63,37.648 26.289,43.307 v1(28.448,43.307)
GH4: C15.2 Q12.4 R15.2 | length 8.8
  Top Layer w0.254: Q12.4@25.878,33.233 v1(26.375,33.233) v1@26.416,33.274 ; R15.2@27.305,38.652 C15.2@27.305,40.469
  Signal Layer 1 w0.254: v1(26.375,33.233) 26.375,38.313 v1(27.305,39.243)
GL: R38.1 U4.7 | length 9.2
  Top Layer w0.178: R38.1@40.64,43.136 41.065,43.136 41.275,42.926 41.275,41.021 40.826,40.572 40.826,38.286 v1(40.767,38.227) 40.767,37.612 41.618,36.761 41.801,36.761 42.169,36.392 42.448,36.392 42.67,36.17 42.67,35.709 U4.7@42.691,35.688
GL1: C2.2 Q3.4 R3.1 | length 6
  Top Layer w0.178: Q3.4@17.612,9.047 v1(17.612,8.55) v1@17.653,8.509
  Top Layer w0.254: R3.1@19.983,9.906 v1(20.637,9.906) C2.2@21.292,9.906
  Signal Layer 1 w0.254: v1(17.612,8.55) 17.612,9.484 18.034,9.906 v1(20.637,9.906)
GL2: C8.2 Q6.2 R7.2 | length 9.6
  Top Layer w0.254: Q6.2@26.259,15.423 26.741,15.423 v1(26.797,15.367) ; R7.2@29.083,13.589 29.127,13.545 v1(29.867,13.545) C8.2@30.607,13.545
  Bottom Layer w0.254: v1(26.797,15.367) 26.67,15.367 26.289,14.986 26.289,12.827 26.708,12.408 29.553,12.408 29.867,12.722 v1(29.867,13.545)
GL3: C14.2 Q9.4 R14.2 | length 14.1
  Top Layer w0.178: Q9.4@18.004,38.948 v1(18.374,38.948) v1@18.415,38.989
  Top Layer w0.254: R14.2@27.73,44.704 v1(28.384,44.704) C14.2@29.039,44.704
  Signal Layer 1 w0.254: v1(18.374,38.948) 20.66,38.948 25.654,43.942 27.622,43.942 v1(28.384,44.704)
GL4: C16.2 Q12.2 R16.2 | length 11.4
  Top Layer w0.254: Q12.2@25.878,31.933 v1(26.345,31.933) v1@26.416,32.004 ; R16.2@28.702,38.652 C16.2@28.702,40.469
  Signal Layer 1 w0.254: v1(26.345,31.933) 26.726,31.933 27.305,32.512 27.305,37.973 27.559,38.227 28.448,38.227 28.702,38.481 v1(28.702,39.243)
GLED: P1.3 R38.2 | length 4.5
  Top Layer w0.254: P1.3@36.787,44.692 40.525,44.692 40.64,44.577 R38.2@40.64,43.986
GND: C3.1 C4.1 C17.1 C18.2 C19.1 C20.1 C21.1 C22.1 C23.1 C24.1 C25.1 C26.1 C27.1 C28.1 J1.1 P1.0 P1.1 pad.2@11.692,9.91 pad.14 Q2.2 Q3.1 Q3.3 Q13.2 R1.1 R3.2 R4.2 R19.2 R27.2 R31.1 R34.1 R35.2 R36.2 U1.4 U1.9 U2.1 U2.2 U2.3 U2.9 U3.4 U3.7 U3.8 U3.11 U3.12 U3.29 U4.3 U4.21 U6.2 U7.2 | length 48.1
  Top Layer w0.178: 18.161,9.398 19.05,9.398 19.133,9.481 R3.2@19.133,9.906 R4.2@19.133,11.303 ; R1.1@34.163,5.163 34.246,5.08 v1(34.798,5.08) 34.94,4.938 Q2.2@35.578,4.938 ; U2.3@39.626,17.074 40.696,17.074 U2.9@41.021,17.399 U2.9@41.021,17.78 ; U2.2@39.626,17.724 40.965,17.724 U2.9@41.021,17.78 ; U2.1@39.626,18.374 40.98,18.374 40.703,18.098 U2.9@41.021,17.78 ; v1(42.291,34.163) U4.3@43.816,34.163 ; C19.1@43.688,17.189 45.93,17.189 v1(45.974,17.145) U1.9@46.355,17.526 ; v1@44.958,13.97 v1(45.002,13.926) C18.2@45.466,13.926 ; R36.2@46.018,32.512 R34.1@46.018,33.909 46.482,33.909 v1(46.736,33.655) ; C27.1@46.018,35.433 v1(46.482,35.433) v1@46.609,35.306 ; v1(47.244,29.972) 47.669,30.397 R35.2@47.669,31.115 ; U1.4@47.33,16.131 47.332,16.129 48.133,16.129 v1(49.022,17.018) R19.2@49.022,17.609 ; v1(49.149,30.734) J1.1@49.149,31.623 ; C28.1@50.082,22.352 v1(50.673,22.352)
  Top Layer w0.254: v1(33.274,38.227) 34.29,39.243 P1.0@34.29,40.542 ; v1(36.195,34.417) U7.2@37.59,34.417 ; v1(36.195,37.465) 36.195,37.973 36.322,38.1 U6.2@37.59,38.1 ; v1(36.703,29.718) R27.2@37.167,29.718 ; P1.1@36.787,45.692 37.691,45.692 38.1,46.101 v1(38.1,46.736) ; C23.1@37.167,24.003 37.167,23.539 v1(37.211,23.495) ; C22.1@37.167,26.797 37.167,26.333 v1(37.211,26.289) ; C24.1@39.116,21.8 C25.1@40.513,21.8 ; v1@40.132,31.75 v1(40.176,31.706) C26.1@40.176,31.115 40.176,30.309 40.386,30.099 41.021,30.099 41.172,29.948 U3.7@41.172,29.349 ; U3.12@40.247,26.424 42.172,26.424 v1(42.672,26.924) ; U3.11@40.247,26.924 v1(42.672,26.924) ; U3.8@40.247,28.424 v1(40.247,28.944) v1@40.259,28.956 ; U3.4@42.672,29.349 v1(42.672,26.924) ; v1@43.688,23.241 v1(43.696,23.233) C20.1@43.696,22.479 ; R31.1@46.863,23.959 v1(47.454,23.959) v1@47.498,24.003 ; Q13.2@47.008,26.401 v1(47.737,26.401) v1@47.752,26.416 ; v1(47.244,29.972) 47.288,29.928 C21.1@47.288,29.464
  other v1: 31.496,3.683 32.004,3.683 32.512,3.683 33.02,3.683 22.225,3.937 22.733,3.937 23.241,3.937 23.749,3.937 31.496,4.191 32.004,4.191 32.512,4.191 33.02,4.191 22.225,4.445 22.733,4.445 23.241,4.445 23.749,4.445 16.129,6.731 16.637,6.731 17.145,6.731 17.653,6.731 16.129,7.239 16.637,7.239 17.145,7.239 17.653,7.239 16.129,7.747 16.637,7.747 17.145,7.747 17.653,7.747 13.843,11.938 9.779,12.065 7.874,14.224 7.747,14.859 7.366,15.494 6.985,16.002 6.477,17.018 45.466,17.145 46.482,17.145 46.99,17.145 40.767,17.653 41.275,17.653 6.223,17.907 45.466,17.907 45.974,17.907 46.482,17.907 46.99,17.907 40.767,18.161 41.275,18.161 5.842,18.669 5.588,19.431 41.021,19.558 5.334,20.193 47.752,20.32 48.26,20.32 47.752,20.828 48.26,20.828 39.814,21.8 42.672,26.416 42.164,26.924 43.18,26.924 42.672,27.432 49.911,27.686 8.255,27.94 11.557,29.464 46.863,39.243 34.036,45.212 34.544,45.212 35.052,45.212 34.036,45.72 34.544,45.72 35.052,45.72
KEY: D3.1 R37.2 U4.6 | length 14.4
  Top Layer w0.178: U4.6@43.091,35.688 v1(43.941,35.688) v1(43.941,35.688) ; v1(45.974,36.322) 46.018,36.366 R37.2@46.018,36.83 ; v1(49.911,30.226) 49.948,30.263 D3.1@50.8,30.263
  Bottom Layer w0.178: v1(43.941,35.688) 44.449,35.688 44.831,35.306 45.847,35.306 45.974,35.433 v1(45.974,36.322) 46.101,36.449 47.879,36.449 49.911,34.417 v1(49.911,30.226)
MCUSCL: R32.1 U3.3 U4.18 | length 4
  Top Layer w0.178: R32.1@42.291,31.115 U4.18@42.291,32.638
  Top Layer w0.254: R32.1@42.291,31.115 42.291,30.48 42.418,30.353 42.926,30.353 43.172,30.107 U3.3@43.172,29.349
MCUSDA: R33.1 U3.2 U4.19 | length 5.6
  Top Layer w0.178: U4.19@42.691,32.638 42.691,32.112 42.926,31.877 44.323,31.877 44.533,31.667 R33.1@44.533,31.115
  Top Layer w0.254: U3.2@43.672,29.349 43.672,30.972 43.815,31.115 R33.1@44.533,31.115
NetC18_1: C18.1 R17.1 U1.1 | length 3
  Top Layer w0.254: U1.1@45.38,16.131 45.38,15.326 45.466,15.24 C18.1@45.466,14.776 R17.1@47.117,14.776
NetD1_2: D1.2 R22.1 | length 4.8
  Top Layer w0.254: D1.2@45.429,22.479 v1(45.429,21.754) v1@45.466,21.717
  Top Layer w0.508: v1(43.688,19.812) 43.696,19.82 R22.1@43.696,20.574
  Bottom Layer w0.508: v1(43.688,19.812) 43.688,21.082 44.36,21.754 v1(45.429,21.754)
NetD6_A: D6.A R43.1 | length 2
  Top Layer w0.254: D6.A@5.207,27.059 5.207,27.813 5.461,28.067 R43.1@5.461,28.912
NetQ1_1: Q1.1 Q1.3 R2.2
NetQ4_1: Q4.1 Q4.3 R6.2 | length 1
  Top Layer w0.254: 37.211,13.589 37.255,13.545 R6.2@38.227,13.545
NetQ7_1: Q7.1 Q7.3 R10.2 | length 7.6
  Top Layer w0.178: v1(18.415,45.847) R10.2@18.415,46.311
  Signal Layer 1 w0.254: v1(15.367,40.894) 16.012,40.894 16.764,41.646 16.764,45.085 17.526,45.847 v1(18.415,45.847)
NetQ10_1: Q10.1 Q10.3 R12.2 | length 16.7
  Top Layer w0.178: 25.908,20.447 v1(25.908,21.59) ; R12.2@32.937,14.351 32.937,13.799 v1(33.02,13.716)
  Bottom Layer w0.178: v1(25.908,21.59) 25.908,21.336 26.289,20.955 32.766,20.955 33.401,20.32 33.401,15.494 33.02,15.113 v1(33.02,13.716)
NetR20_1: R20.1 U2.6 | length 13.3
  Top Layer w0.254: R20.1@38.354,18.84 v1(38.354,19.304) ; U2.6@42.289,17.074 U2.6@42.416,17.074 42.997,17.074 v1(43.053,17.018)
  Signal Layer 1 w0.254: v1(38.354,19.304) 38.354,18.669 40.005,17.018 v1(43.053,17.018)
  Bottom Layer w0.254: v1(38.354,19.304) 38.354,18.669 40.005,17.018 v1(43.053,17.018)
NetR21_1: R21.1 U2.4 | length 1.4
  Top Layer w0.254: R21.1@38.354,16.681 38.818,16.681 39.075,16.424 U2.4@39.626,16.424
NetR41_2: R41.2 U6.1 | length 2.6
  Top Layer w0.178: U6.1@37.59,36.83 37.59,36.197 37.719,36.068 38.481,36.068 38.779,36.366 R41.2@39.37,36.366
NetR42_2: R42.2 U7.1 | length 2
  Top Layer w0.178: U7.1@37.59,33.147 38.481,33.147 39.033,32.595 R42.2@39.37,32.595
PWMH: R36.1 U2.7 U4.1 | length 22.5
  Top Layer w0.178: U2.7@42.416,17.724 42.416,17.768 43.295,17.768 43.688,18.161 v1(43.688,18.669) ; U4.1@43.816,33.363 44.361,33.363 44.577,33.147 v1(44.577,32.512) R36.1@45.168,32.512
  Bottom Layer w0.178: v1(43.688,18.669) 42.291,18.669 42.037,18.923 42.037,23.114 44.45,25.527 44.45,28.365 46.228,30.143 46.228,32.004 45.72,32.512 v1(44.577,32.512)
PWML: R35.1 U2.8 U4.20 | length 25.8
  Top Layer w0.178: U2.8@42.416,18.374 43.012,18.374 43.18,18.542 43.18,19.05 v1(42.926,19.304) ; U4.20@43.091,32.638 v1(43.941,32.638) v1(43.941,32.638) ; R35.1@46.819,31.115 46.819,31.706 v1(46.863,31.75)
  Signal Layer 1 w0.178: v1(43.941,32.638) 43.941,29.465 44.323,29.083 46.101,29.083 46.355,29.337 46.355,30.226 46.863,30.734 v1(46.863,31.75)
  Bottom Layer w0.178: v1(42.926,19.304) 42.926,23.241 45.085,25.4 45.085,28.067 46.736,29.718 46.736,31.623 v1(46.863,31.75)
RL: R39.1 U4.9 | length 17
  Top Layer w0.178: v1(38.354,43.434) 38.652,43.136 R39.1@39.243,43.136 ; v1(40.005,38.227) 40.005,37.853 41.466,36.392 41.648,36.392 41.891,36.15 U4.9@41.891,35.688
  Signal Layer 1 w0.178: v1(38.354,43.434) 38.354,43.815 38.481,43.942 38.481,45.847 38.989,46.355 40.005,46.355 40.259,46.101 40.259,38.608 40.005,38.354 v1(40.005,38.227)
RLED: P1.4 R39.2 | length 2.5
  Top Layer w0.254: P1.4@36.787,44.192 38.485,44.192 38.691,43.986 R39.2@39.243,43.986
TKEY: D2.2 D3.2 P1.2 | length 34.4
  Top Layer w0.254: P1.2@36.787,45.192 39.223,45.192 v1(39.751,45.72)
  Top Layer w0.508: D2.2@50.8,26.453 v1(50.8,27.178) D3.2@50.8,27.903
  Signal Layer 1 w0.254: v1(39.751,45.72) 39.751,38.989 39.459,38.697 39.459,37.808 39.675,37.592 40.894,37.592 41.91,36.576 43.688,36.576 45.339,38.227 45.339,38.735 45.984,38.735 50.292,34.427 50.292,33.528 50.8,33.02 v1(50.8,27.178)
TSIN1: R27.1 U3.10 | length 4.4
  Top Layer w0.254: R27.1@38.017,29.718 38.735,29.718 38.862,29.591 38.862,27.559 38.997,27.424 U3.10@40.247,27.424
TSIN2: C26.2 R28.2 U3.9 | length 5.4
  Top Layer w0.254: R28.2@38.017,31.115 39.287,31.115 39.326,31.076 C26.2@39.326,31.115 ; C26.2@39.453,31.115 39.37,31.032 39.37,28.067 39.513,27.924 U3.9@40.247,27.924
VC2: C22.2 R23.2 U3.13 | length 4.3
  Top Layer w0.254: R23.2@38.017,28.194 C22.2@38.017,26.797 38.017,26.253 38.227,26.043 38.854,26.043 38.973,25.924 U3.13@40.247,25.924
VC3: C23.2 R24.2 U3.14 | length 3.6
  Top Layer w0.254: C23.2@38.017,24.003 R24.2@38.017,25.4 38.041,25.424 U3.14@40.247,25.424